# EAGLE board SparkFun_QwiicBus_Endpoint-Panel (EAGLE 9.6.0), part 1 of 4
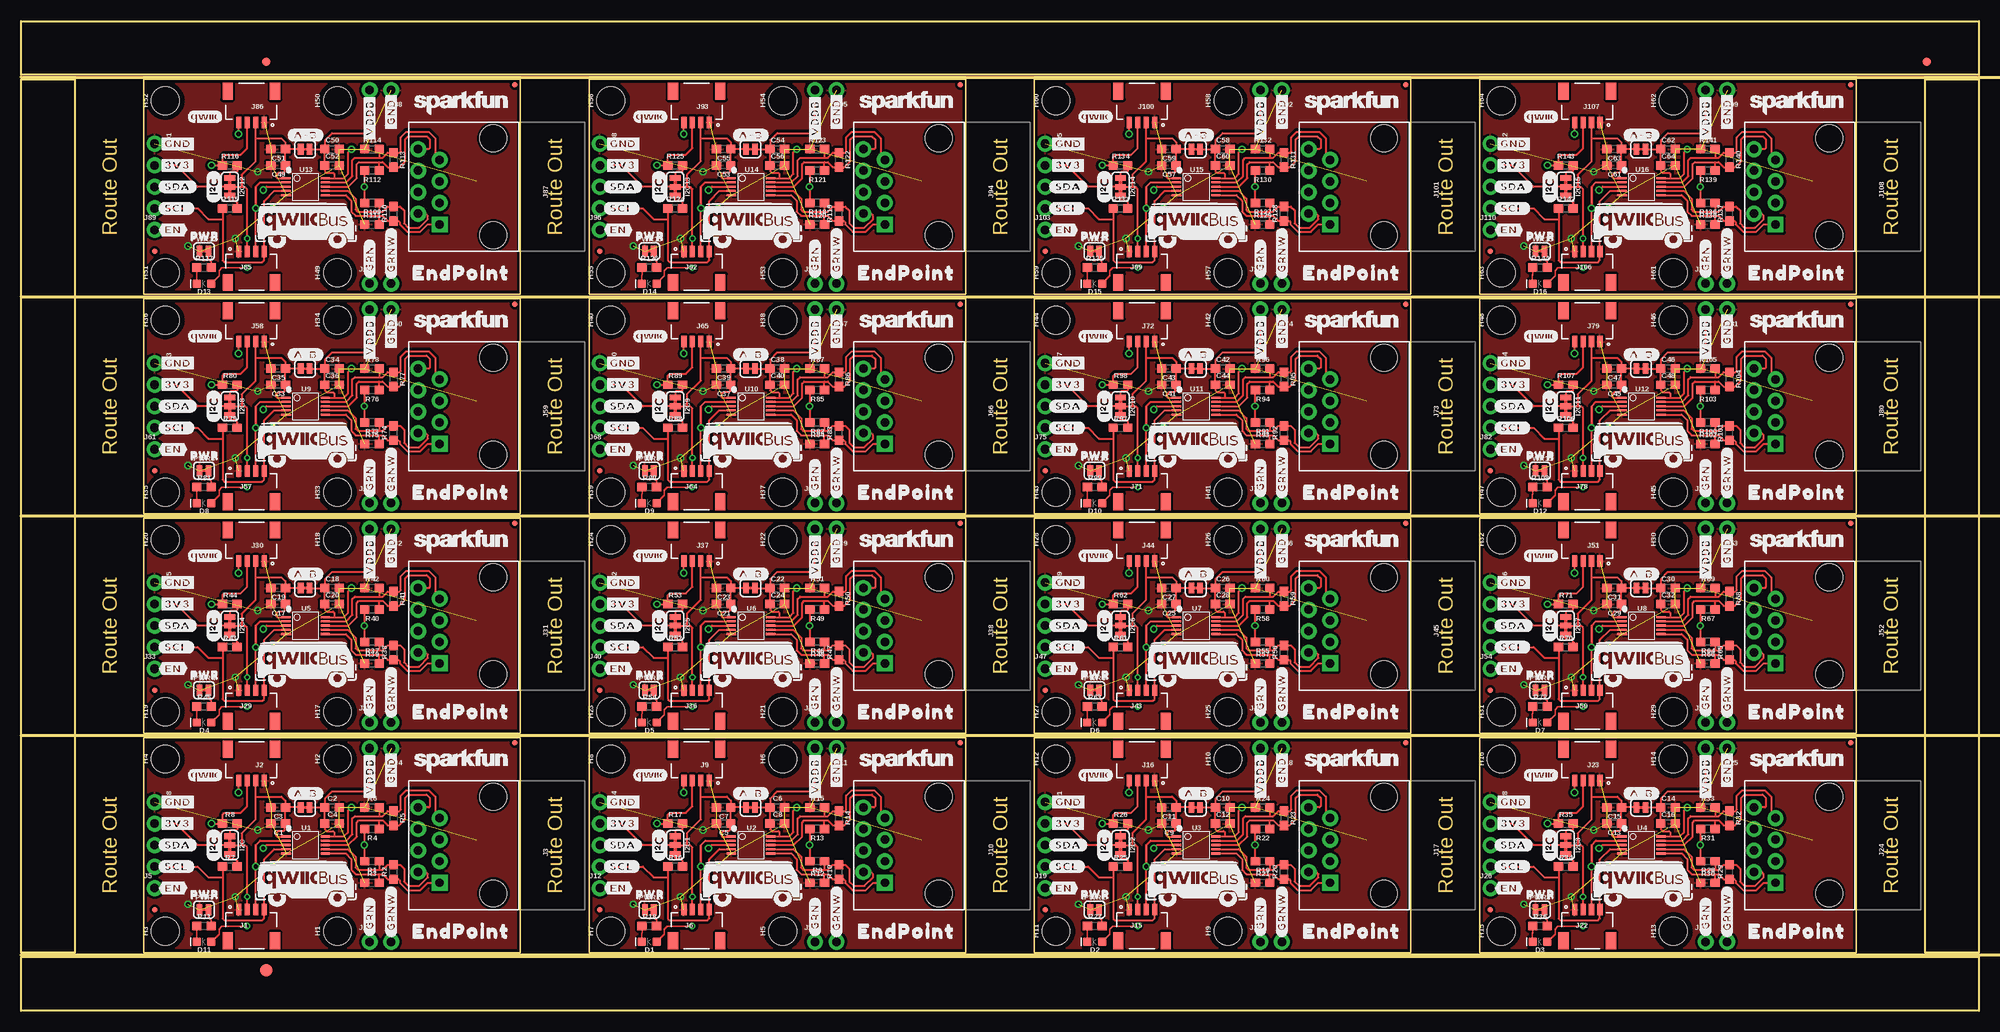
[diagram p0: board, top side]
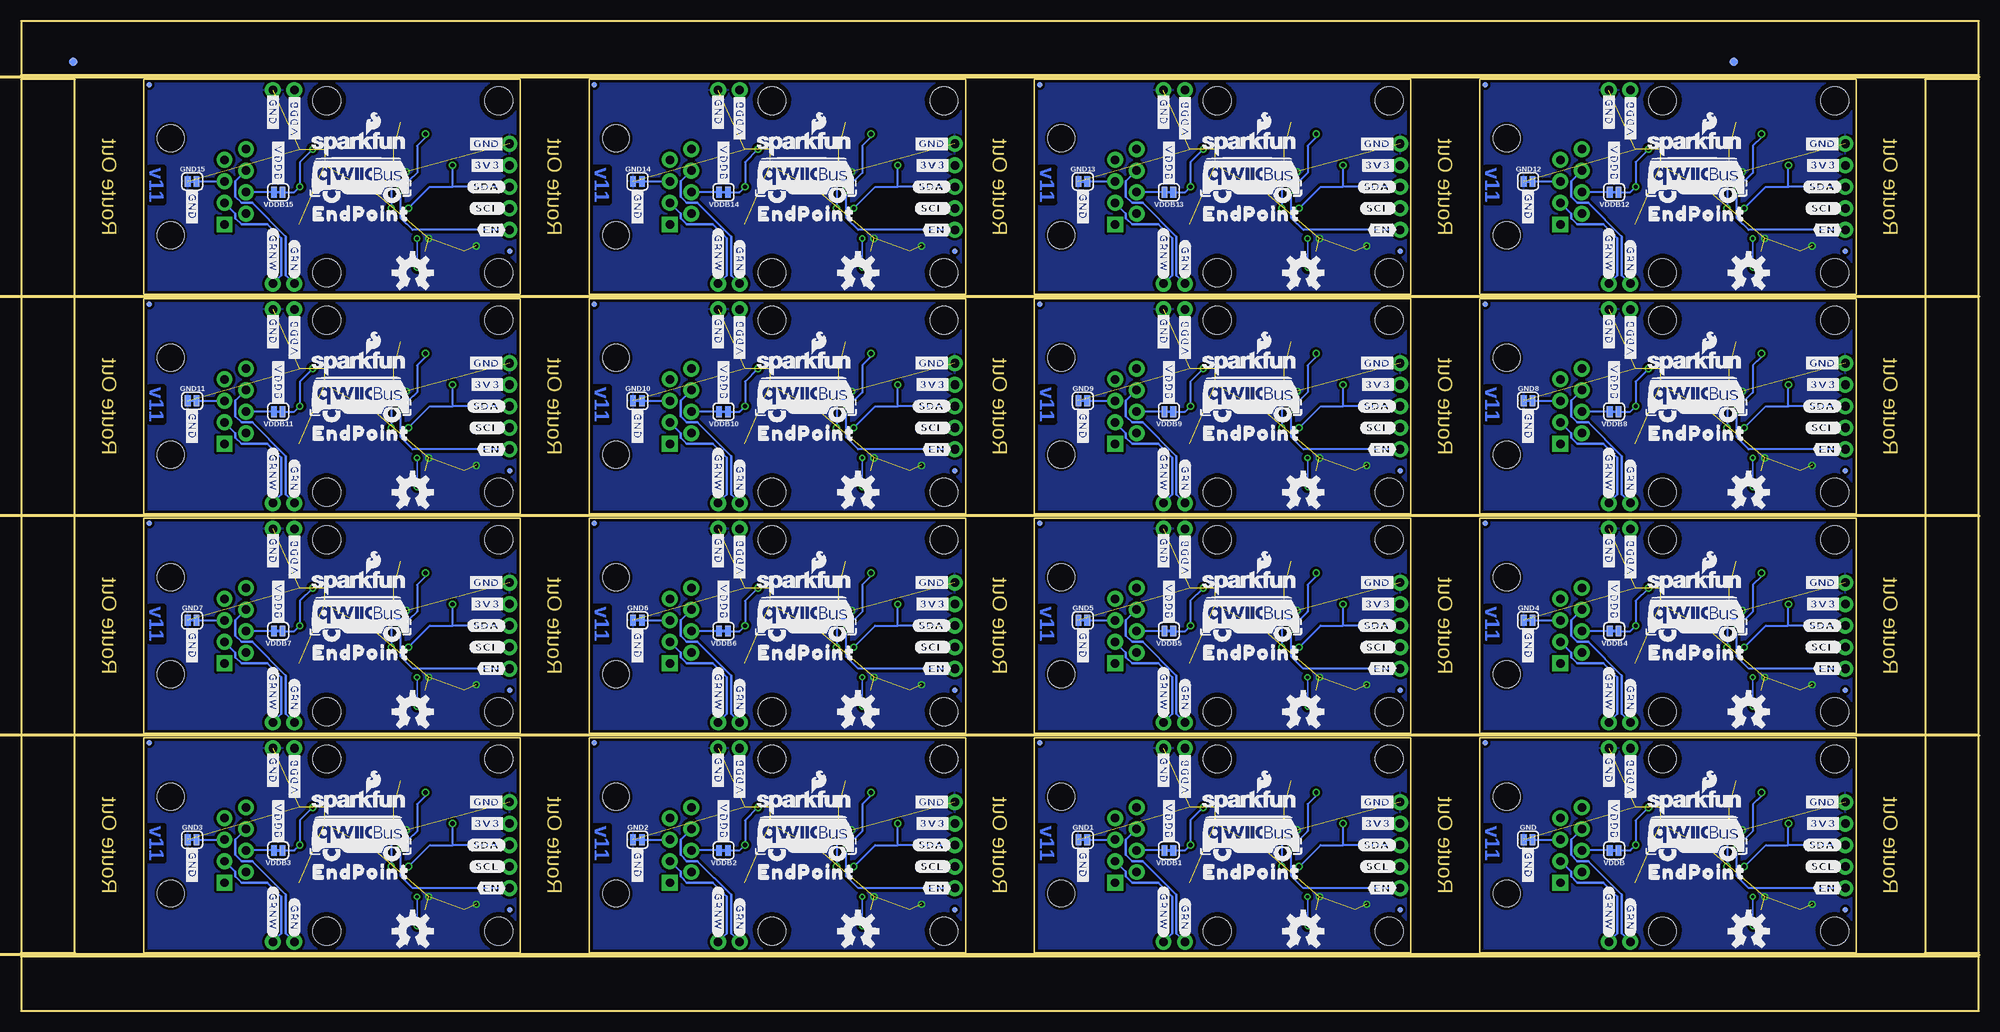
[diagram p1: board, bottom side, seen from below]

Size 231.14 x 116.84 mm. Coordinates in mm from the lower left corner, seen from the top.
Outline: 58.93,6.86 14.48,6.86 14.48,32.26 58.93,32.26 58.93,6.86
Outline: 111.51,6.86 67.06,6.86 67.06,32.26 111.51,32.26 111.51,6.86
Outline: 164.08,6.86 119.63,6.86 119.63,32.26 164.08,32.26 164.08,6.86
Outline: 216.66,6.86 172.21,6.86 172.21,32.26 216.66,32.26 216.66,6.86
Outline: 58.93,32.77 14.48,32.77 14.48,58.17 58.93,58.17 58.93,32.77
Outline: 111.51,32.77 67.06,32.77 67.06,58.17 111.51,58.17 111.51,32.77
Outline: 164.08,32.77 119.63,32.77 119.63,58.17 164.08,58.17 164.08,32.77
Outline: 216.66,32.77 172.21,32.77 172.21,58.17 216.66,58.17 216.66,32.77
Outline: 58.93,58.67 14.48,58.67 14.48,84.07 58.93,84.07 58.93,58.67
Outline: 111.51,58.67 67.06,58.67 67.06,84.07 111.51,84.07 111.51,58.67
Outline: 164.08,58.67 119.63,58.67 119.63,84.07 164.08,84.07 164.08,58.67
Outline: 216.66,58.67 172.21,58.67 172.21,84.07 216.66,84.07 216.66,58.67
Outline: 58.93,84.58 14.48,84.58 14.48,109.98 58.93,109.98 58.93,84.58
Outline: 111.51,84.58 67.06,84.58 67.06,109.98 111.51,109.98 111.51,84.58
Outline: 164.08,84.58 119.63,84.58 119.63,109.98 164.08,109.98 164.08,84.58
Outline: 216.66,84.58 172.21,84.58 172.21,109.98 216.66,109.98 216.66,84.58
Outline: 0,6.35 231.14,6.35 231.14,0 0,0 0,6.35
Outline: 224.79,109.98 231.14,109.98 231.14,6.86 224.79,6.86 224.79,109.98
Outline: 0,116.84 231.14,116.84 231.14,110.49 0,110.49 0,116.84
Outline: 0,109.98 6.35,109.98 6.35,6.86 0,6.86 0,109.98
Copper layers (1*16): Top 0.035mm / dielectric 1.5mm / Bottom 0.035mm
Design rules "SparkFun_QwiicBus_EndPoint": minimum track width 7mil, minimum drill 15mil, track to track 7mil, track to pad 7mil, pad to pad 7mil, via to via 7mil, smd to smd 7mil, copper to edge 7mil, drill to drill 7mil, minimum pad ring 7mil, minimum via ring 7mil, stop-mask expansion 4mil, vias tented up to drill 25mil, thermal gap 10mil
Net classes: 0 default: width 0.203 mm
Milling: 5 lines

## Footprints (pad centres in the part's own frame; a part is rotated, then mirrored left to right if it is on the bottom)
SMT-JUMPER_2_NC_TRACE_SILK = smd 0.66 x 1.27: 1 -0.521,0; 2 0.521,0
0603 = smd 1.1 x 1: 1 -0.85,0; 2 0.85,0
LED-0603 = smd 1 x 1: A -0.877,0; C 0.877,0
FIDUCIAL-1X2 = smd 1 x 1: 1 0,0
FIDUCIAL-1.5X3 = smd 1.5 x 1.5: 1 0,0
FIDUCIAL-MICRO = smd 0.635 x 0.635: 1 0,0
STAND-OFF = hole 3.302: 0,0
SMT-JUMPER_3_2-NC_TRACE_SILK = smd 0.66 x 1.27: 1 -1.041,0; 2 0,0; 3 1.041,0
JST04_1MM_RA = smd 0.6 x 1.35: 1 -1.5,0; 2 -0.5,0; 3 0.5,0; 4 1.5,0 | smd 1.2 x 2: NC1 2.8,-3.675; NC2 -2.8,-3.675
RJ45-8 = drill 1 pad 1.88 square: 1 -4.445,6.35 | drill 1 pad 1.88: 2 -3.175,8.89; 3 -1.905,6.35; 4 -0.635,8.89; 5 0.635,6.35; 6 1.905,8.89; 7 3.175,6.35; 8 4.445,8.89 | hole 3.2: -5.715,0; 5.715,0
1X02_NO_SILK = drill 1.016 pad 1.88: 1 0,0; 2 2.54,0
1X01_NO_SILK = drill 1.016 pad 1.88: 1 0,0
1X04_NO_SILK = drill 1.016 pad 1.88: 1 0,0; 2 2.54,0; 3 5.08,0; 4 7.62,0
TSSOP10 = smd 1.1 x 0.25: 1 -2.259,1.018; 2 -2.259,0.517; 3 -2.259,0.018; 4 -2.259,-0.482; 5 -2.259,-0.988; 6 2.366,-0.988; 7 2.366,-0.482; 8 2.366,0.018; 9 2.366,0.517; 10 2.366,1.018